# Altium PCB ver060.PcbDoc (part 2 of 2)
Units mm, origin at the board's own origin, x right, y up, seen from the top; angles counter-clockwise.
Board outline 100 x 49.5 mm, 4 copper layers (ASIG, GND1, GND2, PWR/DSIG), stack 1.569 mm thick; 117 components, 72 nets, 379 pads, 822 vias.
Unrouted connection lines stored in the file: 69.
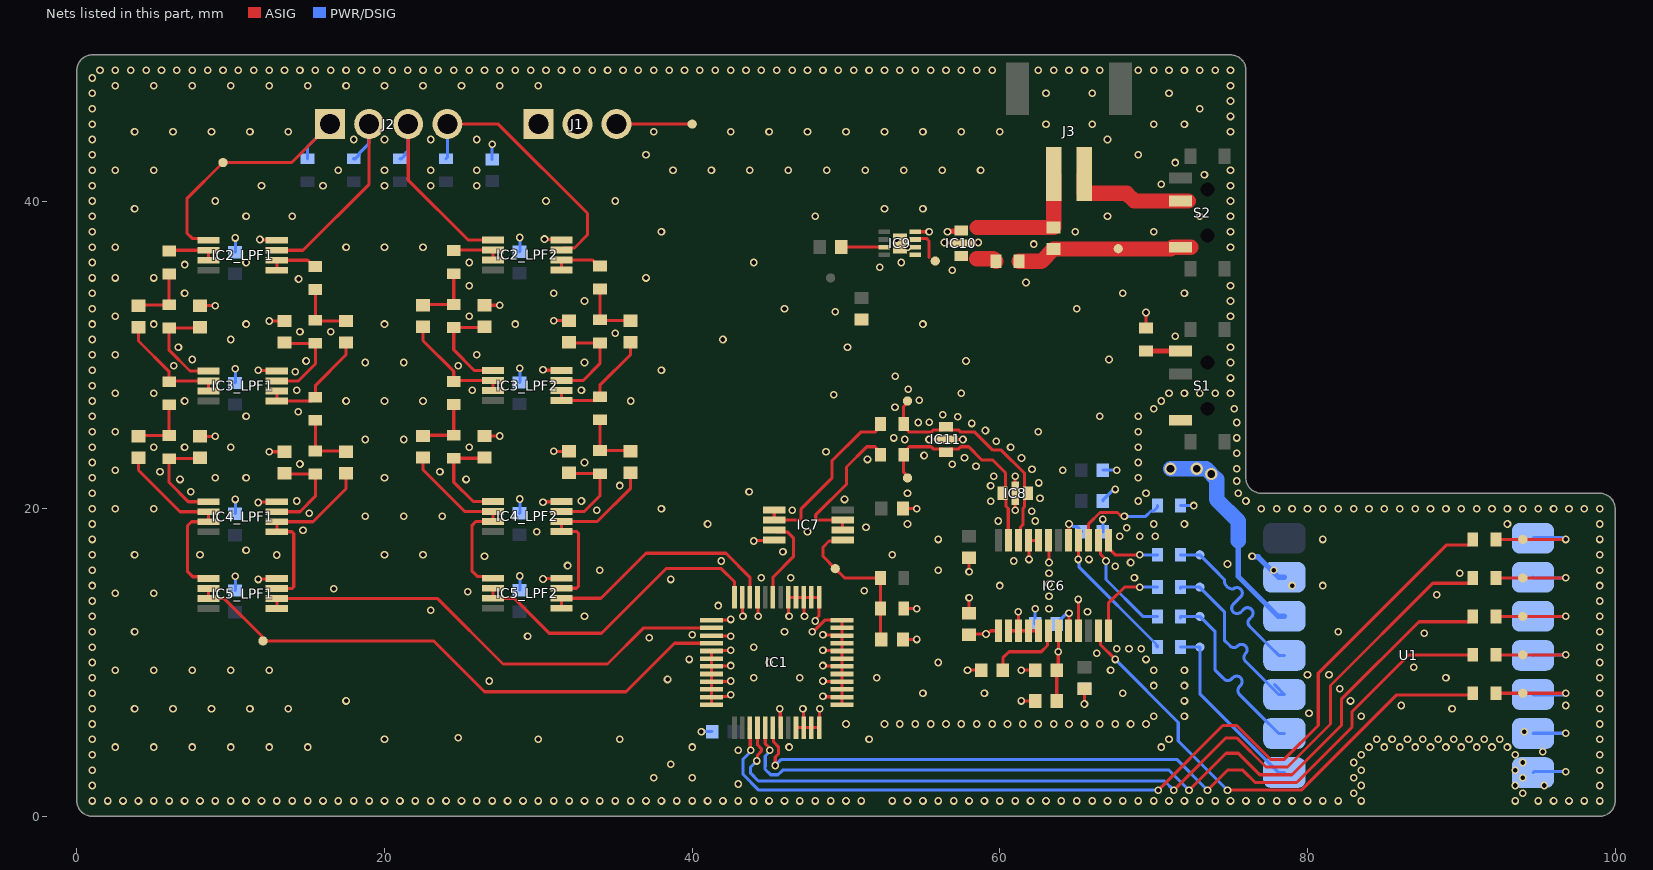
[diagram p4: the nets of this part, all layers, seen from the top]

## Via types
v1: diameter 0.5, hole 0.3, ASIG to PWR/DSIG, tented both sides, 784 vias
v2: diameter 0.8, hole 0.5, ASIG to PWR/DSIG, tented both sides, 30 vias
v3: diameter 0.8, hole 0.5, ASIG to PWR/DSIG, 8 vias

## Nets (pads, with @x,y where several pads share a name; then routed paths per layer and width w, separated by ;. In a path a pad name is that pad's centre, name@x,y a point inside that pad or via, vN(x,y) a via of type N, cw(c..) or ccw(c..) an arc to the next point about the centre after c; other vN are vias at no path point) (continued)
GND: C1.1 C4_LPF1.1 C4_LPF2.1 C5_LPF1.1 C5_LPF2.1 C6_LPF1.1 C6_LPF2.1 C7_LPF1.1 C7_LPF2.1 C8_LPF1.1 C8_LPF2.1 C9_LPF1.1 C9_LPF2.1 C10_LPF1.1 C10_LPF2.1 C11_LPF1.1 C11_LPF2.1 C14.2 C15.2 C16.2 C17.2 C18.2 C19.2 C20.1 C20.2 C21.1 C21.2 C22.2 C23.1 C24.1 C24.2 C25.2 C26.2 C28.2 C29.2 C30.1 IC1.1 IC1.3 IC1.5 IC1.6 IC1.7 IC1.8 IC1.9 IC1.10 IC1.11 IC1.12 IC1.19 IC1.21 IC1.22 IC1.23 IC1.24 IC1.25 IC1.26 IC1.27 IC1.28 IC1.29 IC1.30 IC1.31 IC1.32 IC1.33 IC1.34 IC1.35 IC1.36 IC1.37 IC1.38 IC1.39 IC1.40 IC1.41 IC1.45 IC1.47 IC2_LPF1.4 IC2_LPF2.4 IC3_LPF1.4 IC3_LPF2.4 IC4_LPF1.4 IC4_LPF2.4 IC5_LPF1.4 IC5_LPF2.4 IC6.7 IC6.8 IC6.9 IC6.13 IC6.14 IC6.15 IC6.16 IC6.17 IC6.19 IC6.21 IC7.4 IC8.G1 IC9.2 IC9.4 IC9.9 IC10.B1 IC10.G1 IC11.G1 J1.1 J1.2 J1.3 J3.2 R6.1 R15.2 R18.2 T1.1 U1.6 U1.7 U1.13 | length 126.7
  ASIG w0.2: C11_LPF1.1@8,24.7 v1(9,24.7) ; C10_LPF1.1@8,33.2 v1(9,33.2) ; v1(11.8,15.4) 11.825,15.425 12.975,15.425 IC5_LPF1.4@13,15.45 ; v1(11.8,20.4) 11.825,20.425 12.975,20.425 IC4_LPF1.4@13,20.45 ; v1(11.8,29) 11.825,28.975 12.975,28.975 IC3_LPF1.4@13,28.95 ; v1(11.9,37.5) 11.925,37.475 12.975,37.475 IC2_LPF1.4@13,37.45 ; v1(12.5,23.7) C5_LPF1.1@13.5,23.7 ; v1(12.5,32.2) C4_LPF1.1@13.5,32.2 ; C11_LPF2.1@26.5,24.725 v1(27.5,24.725) ; C10_LPF2.1@26.5,33.225 v1(27.5,33.225) ; v1(30.3,15.425) 30.325,15.45 31.475,15.45 IC5_LPF2.4@31.5,15.475 ; v1(30.3,20.425) 30.325,20.45 31.475,20.45 IC4_LPF2.4@31.5,20.475 ; v1(30.3,29.025) 30.325,29 31.475,29 IC3_LPF2.4@31.5,28.975 ; v1(30.4,37.525) 30.425,37.5 31.475,37.5 IC2_LPF2.4@31.5,37.475 ; v1(31,23.725) C5_LPF2.1@32,23.725 ; v1(31,32.225) C4_LPF2.1@32,32.225 ; J1.3@35.08,45 T1.1@40,45 ; IC1.12@41.262,7.25 IC1.11@41.262,7.75 ; IC1.3@41.262,11.75 41.287,11.725 42.475,11.725 v1(42.5,11.7) ; IC1.1@41.262,12.75 41.287,12.775 42.475,12.775 v1(42.5,12.8) ; v1(42.5,7.9) 42.419,7.9 42.299,7.781 41.293,7.781 IC1.11@41.262,7.75 ; v1(42.5,8.8) 42.475,8.775 41.287,8.775 IC1.9@41.262,8.75 ; v1(42.5,9.8) 42.475,9.775 41.287,9.775 IC1.7@41.262,9.75 ; v1(42.5,10.8) 42.475,10.775 41.287,10.775 IC1.5@41.262,10.75 IC1.6@41.262,10.25 IC1.7@41.262,9.75 ; IC1.47@43.25,14.238 43.275,14.213 43.275,13.025 v1(43.3,13) ; v1(44,17.9) 44.032,17.932 45.303,17.932 IC7.4@45.336,17.964 ; IC1.45@44.25,14.238 44.275,14.213 44.275,13.025 v1(44.3,13) ; v1(45.7,7) 45.725,6.975 45.725,5.787 IC1.19@45.75,5.762 ; v1(46.3,13) 46.275,13.025 46.275,14.213 IC1.41@46.25,14.238 IC1.40@46.75,14.238 IC1.39@47.25,14.238 ; IC1.21@46.75,5.762 IC1.22@47.25,5.762 ; v1(47.2,7) 47.225,6.975 47.225,5.787 IC1.22@47.25,5.762 ; v1(47.3,13) 47.275,13.025 47.275,14.213 IC1.39@47.25,14.238 ; v1(47.8,12) 47.866,12 48.616,12.75 IC1.36@49.738,12.75 IC1.35@49.738,12.25 IC1.34@49.738,11.75 ; v1(48,12.7) 48,12.781 48.25,13.031 IC1.37@48.25,14.238 IC1.38@47.75,14.238 IC1.39@47.25,14.238 ; v1(48.3,7) 48.275,6.975 48.275,5.787 IC1.24@48.25,5.762 IC1.23@47.75,5.762 IC1.22@47.25,5.762 ; v1(48.5,7.8) 48.525,7.775 49.713,7.775 IC1.26@49.738,7.75 ; v1(48.5,8.8) 48.525,8.775 49.713,8.775 IC1.28@49.738,8.75 ; v1(48.5,9.8) 48.525,9.775 49.713,9.775 IC1.30@49.738,9.75 ; v1(48.5,10.8) 48.525,10.775 49.713,10.775 IC1.32@49.738,10.75 ; v1(48.5,11.8) 48.525,11.775 49.713,11.775 IC1.34@49.738,11.75 ; IC1.25@49.738,7.25 IC1.26@49.738,7.75 ; C23.1@53.7,11.5 v1(54.6,11.5) ; C26.2@53.7,20 v1(54.6,20) ; R6.1@53.75,13.5 v1(54.6,13.5) ; v1(54,37) IC9.2@54.5,37 ; IC9.4@54.5,38 v1(55.4,38) ; v1(55.4,24.5) v1(57.6,24.5) ; v1(56.4,37.3) 56.425,37.275 58.575,37.275 v1(58.6,37.3) ; v1(57.9,9.5) C22.2@58.8,9.5 ; C24.1@58,11.8 58.05,11.85 v1(59.1,11.85) ; C24.2@58,13.2 v1(58,14.2) ; v1(58,15.9) C25.2@58,16.8 ; v1@59.1,11.8 59.138,11.8 59.4,12.062 IC6.13@59.925,12.062 ; IC6.14@60.575,12.062 IC6.15@61.225,12.062 ; v1(61,19.9) IC8.G1@61,21 v1(61,22.1) ; v1(61.2,13.3) 61.212,13.287 61.212,12.074 IC6.15@61.225,12.062 ; v1(61.4,7.5) C21.1@62.3,7.5 ; v1(61.4,9.5) C20.1@62.3,9.5 ; v1(61.9,16.7) 61.887,16.713 61.887,17.925 IC6.9@61.875,17.938 IC6.8@62.525,17.938 IC6.8@62.512,17.925 ; IC6.17@62.525,12.062 IC6.16@61.875,12.062 IC6.15@61.225,12.062 ; IC6.7@63.175,17.938 63.187,17.925 63.187,16.513 v1(63.2,16.5) ; C21.2@63.7,7.5 C20.2@63.7,9.5 63.8,9.6 v1(63.8,10.7) 63.812,10.712 63.812,12.049 IC6.19@63.825,12.062 ; v1(65.1,14.1) 65.112,14.088 65.112,12.074 IC6.21@65.125,12.062 ; v1(65.5,7.3) C14.2@65.5,8.3 ; R18.2@69.5,31.75 v1(69.5,32.75) ; IC1.11@41.262,7.75 IC1.10@41.262,8.25 IC1.9@41.262,8.75 ; IC1.9@41.262,8.75 IC1.8@41.262,9.25 IC1.7@41.262,9.75 ; IC1.26@49.738,7.75 IC1.27@49.738,8.25 IC1.28@49.738,8.75 ; IC1.28@49.738,8.75 IC1.29@49.738,9.25 IC1.30@49.738,9.75 ; IC1.30@49.738,9.75 IC1.31@49.738,10.25 IC1.32@49.738,10.75 ; IC1.32@49.738,10.75 IC1.33@49.738,11.25 IC1.34@49.738,11.75
  ASIG w0.35: v1(56.6,38) 56.641,38 56.671,38.03 57.45,38.03 IC10.B1@57.5,38.08
  ASIG w1: 58.517,38.28 C29.2@63.5,38.28 J3.2@63.5,41.75
  PWR/DSIG w0.2: C9_LPF1.1@10.275,14.675 10.3,14.7 v1(10.3,15.6) ; C8_LPF1.1@10.275,19.675 10.3,19.7 v1(10.3,20.6) ; C7_LPF1.1@10.275,28.175 10.3,28.2 v1(10.3,29.1) ; C6_LPF1.1@10.275,36.675 10.3,36.7 v1(10.3,37.6) ; C30.1@27,42.7 v1(27,43.7) ; C9_LPF2.1@28.775,14.7 28.8,14.725 v1(28.8,15.625) ; C8_LPF2.1@28.775,19.7 28.8,19.725 v1(28.8,20.625) ; C7_LPF2.1@28.775,28.2 28.8,28.225 v1(28.8,29.125) ; C6_LPF2.1@28.775,36.7 28.8,36.725 v1(28.8,37.625) ; v1(40.6,5.5) C1.1@41.3,5.5 ; C19.2@62.3,12.5 v1(62.3,13.5) ; v1(65.5,7.3) C15.2@65.5,8.3 ; C18.2@66.7,18.5 v1(66.7,19.3) ; C17.2@66.7,20.5 66.7,20.55 67.343,21.193 67.443,21.193 v1(67.5,21.25) ; C16.2@66.7,22.5 v1(67.6,22.5) ; R15.2@71.75,20.2 v1(72.6,20.2) ; U1.7@94.665,2.84 94.725,2.9 v1(96.8,2.9) ; U1.6@94.665,5.38 94.685,5.4 v1(96.8,5.4)
  PWR/DSIG w0.35: v1(76.4,16.9) 76.429,16.871 76.794,16.871 78.125,15.54 U1.13@78.5,15.54
  other v1: 1,1 2,1 3,1 4,1 5,1 6,1 7,1 8,1 9,1 10,1 11,1 12,1 13,1 14,1 15,1 16,1 17,1 18,1 19,1 20,1 21,1 22,1 23,1 24,1 25,1 26,1 27,1 28,1 29,1 30,1 31,1 32,1 33,1 34,1 35,1 36,1 37,1 38,1 39,1 40,1 41,1 42,1 43,1 44,1 45,1 46,1 47,1 48,1 49,1 50,1 51,1 53,1 54,1 55,1 56,1 57,1 58,1 59,1 60,1 61,1 62,1 63,1 64,1 65,1 66,1 67,1 68,1 69,1 70,1 71,1 72,1 73,1 74,1 75,1 76,1 77,1 78,1 79,1 80,1 81,1 82,1 83.5,1 93.5,1 95,1 96,1 97,1 98,1 99,1 83,1.5 94,1.5 1,2 83.5,2 93.5,2 95.4,2 99,2 43,2.1 37.5,2.5 40,2.5 83,2.5 94,2.5 1,3 83.5,3 93.5,3 99,3 38.606,3.387 83,3.5 94,3.5 1,4 83.5,4 93.5,4 99,4 95.3,4.2 43,4.3 2.5,4.5 5,4.5 7.5,4.5 10,4.5 12.5,4.5 15,4.5 40,4.5 46.3,4.5 70.5,4.5 84,4.5 85,4.5 86,4.5 87,4.5 88,4.5 89,4.5 90,4.5 91,4.5 92,4.5 93,4.5 1,5 20,5 30,5 35.3,5 51.5,5 71,5 84.5,5 85.5,5 86.5,5 87.5,5 88.5,5 89.5,5 90.5,5 91.5,5 92.5,5 99,5 24.8,5.1 94.1,5.5 1,6 50,6 52.5,6 53.5,6 54.5,6 55.5,6 56.5,6 57.5,6 58.5,6 59.5,6 60.5,6 61.5,6 62.5,6 63.5,6 64.5,6 65.5,6 66.5,6 67.5,6 68.5,6 69.5,6 99,6 70,6.5 72,6.5 83.5,6.5 80.1,6.7 1,7 3.75,7 6.25,7 8.75,7 11.25,7 13.75,7 89.4,7 99,7 86.1,7.2 96.8,7.2 17.5,7.5 72,7.5 82.8,7.5 1,8 55,8 59,8 68,8 99,8 82.1,8.3 70,8.5 72,8.5 26.8,8.8 38.4,8.9 1,9 44,9 47,9 52,9 89,9 99,9 80,9.2 81.4,9.2 2.5,9.5 5,9.5 7.5,9.5 10,9.5 12.5,9.5 67.2,9.5 70,9.5 72,9.5 86.9,9.7 1,10 45,10 56,10 99,10 39.8,10.2 69.5,10.2 66.3,10.6 67.6,10.9 68.4,10.9 69.2,10.9 1,11 44,11 99,11 37.2,11.6 29.3,11.7 40,11.8 87.6,11.9 1,12 3.75,12 46,12 82,12 99,12 1,13 33,13 99,13 65.7,13.3 23,13.4 63.2,13.5 41.7,13.7 1,14 99,14 63.2,14.3 88.4,14.4 2.5,14.5 5,14.5 25.4,14.6 51.195,14.657 16.7,14.8 1,15 60,15 79,15 81,15 99,15 63.2,15.1 38.6,15.4 44.5,15.5 46.4,15.5 68.75,15.5 63.2,15.8 89.9,15.8 1,16 34,16 56,16 77.8,16 99,16 67.5,16.25 31.9,16.3 74.8,16.4 68.5,16.5 41.9,16.6 60.9,16.6 65.8,16.7 26.5,16.9 1,17 3.75,17 8,17 12.988,16.988 20,17 22.5,17 53,17 99,17 45.9,17.2 11,17.3 1,18 56,18 81,18 99,18 67.8,18.2 69.1,18.2 70.1,18.2 29.9,18.5 47.5,18.5 14.7,18.6 68.25,18.75 51.3,18.8 1,19 41,19 54,19 70,19 72,19 93,19 99,19 59.9,19.2 62.3,19.2 18.75,19.5 21.25,19.5 23.75,19.5 15.1,19.7 62.081,19.825 33.8,19.9 46.5,19.9 1,20 2.5,20 5,20 38,20 77,20 78,20 79,20 80,20 81,20 82,20 83,20 84,20 85,20 86,20 87,20 88,20 89,20 90,20 91,20 92,20 93,20 94,20 95,20 96,20 97,20 98,20 99,20 59.406,20.482 14.3,20.5 32.8,20.5 69,20.5 76,20.5 49.9,20.6 62.609,20.675 1,21 54,21 69.5,21 75.5,21 7.4,21.1 43.7,21.1 59.399,21.482 35.3,21.5 62.539,21.672 75.4,21.8 6.7,21.9 25.3,21.9 1,22 9,22 11,22 20,22 69,22 59.6,22.1 5.4,22.4 23.6,22.4 2.5,22.5 64.1,22.5 62.091,22.566 75.4,22.6 58.454,22.754 56.917,22.891 14.5,22.9 1,23 33,23 69,23 51.4,23.2 57.7,23.3 61.407,23.295 55.075,23.458 75.4,23.6 48.7,23.7 1,24 5,24 7,24 10,24 25.5,24 60.699,24.003 69,24 59.771,24.374 53.819,24.494 18.75,24.5 21.25,24.5 53.1,24.6 75.4,24.6 1,25 2.5,25 62.5,25 69,25 59.064,25.081 58.176,25.542 54.7,25.6 55.416,25.609 75.4,25.6 57.273,25.97 1,26 11,26 66.5,26 69,26 56.282,26.109 14.4,26.3 70,26.5 75.25,26.5 53.183,26.589 1,27 7,27 17.5,27 20,27 22.5,27 36,27 70.5,27 54.756,27.053 49.2,27.4 2.5,27.5 5,27.5 57.5,27.5 71,27.5 72,27.5 73,27.5 74,27.5 75,27.5 14.3,27.7 25.7,27.7 32.8,27.7 54.044,27.756 1,28 75,28.5 53.2,28.6 14.2,28.9 1,29 38,29 6.3,29.3 24.8,29.3 18.75,29.5 21.25,29.5 33,29.5 75,29.5 14.9,29.6 57.8,29.6 7.5,29.7 67.1,29.7 1,30 2.5,30 26,30 6.6,30.5 50.1,30.5 75,30.5 1,31 10,31 42,31 71.4,31.2 35,31.4 14.5,31.5 16.5,31.5 1,32 5,32 11,32 20,32 28.5,32 55,32 2.5,32.5 25.5,32.5 75,32.5 49.3,32.8 1,33 46,33 65,33 33,33.5 75,33.5 1,34 7,34 31,34 68,34 72,34 25.5,34.5 75,34.5 61.7,34.7 14.412,34.93 1,35 2.5,35 5,35 37,35 56.9,35.5 52.2,35.7 7.022,35.868 1,36 11,36 25.5,36 44,36 53.6,36 1,37 2.5,37 17.5,37 20,37 22.5,37 75,37 62.2,37.2 53.3,37.5 1,38 38,38 64.9,38 70,38 75,38 1,39 11,39 14,39 48,39 67,39 73,39 75,39 3.75,39.5 52.5,39.5 55,39.5 1,40 9,40 30.5,40 35,40 75,40 1,41 12,41 16,41 20,41 23,41 26,41 75,41 70.5,41.1 73.3,41.7 1,42 2.5,42 5,42 17,42 20,42 23,42 26,42 38.75,42 41.25,42 43.75,42 46.25,42 48.75,42 51.25,42 53.75,42 56.25,42 58.75,42 75,42 71.4,42.5 1,43 37,43 69,43 1,44 18,44 20,44 23,44 26,44 67,44 3.75,44.5 6.25,44.5 8.75,44.5 11.25,44.5 13.75,44.5 37.5,44.5 42.5,44.5 45,44.5 47.5,44.5 50,44.5 52.5,44.5 55,44.5 57.5,44.5 60,44.5 75,44.5 1,45 63,45 66,45 70,45 72,45 75,45.5 1,46 73,46 75,46.5 1,47 63,47 66,47 71,47 2.5,47.5 5,47.5 7.5,47.5 10,47.5 12.5,47.5 15,47.5 17.5,47.5 20,47.5 22.5,47.5 25,47.5 27.5,47.5 30,47.5 75,47.5 1,48 1.5,48.5 2.5,48.5 3.5,48.5 4.5,48.5 5.5,48.5 6.5,48.5 7.5,48.5 8.5,48.5 9.5,48.5 10.5,48.5 11.5,48.5 12.5,48.5 13.5,48.5 14.5,48.5 15.5,48.5 16.5,48.5 17.5,48.5 18.5,48.5 19.5,48.5 20.5,48.5 21.5,48.5 22.5,48.5 23.5,48.5 24.5,48.5 25.5,48.5 26.5,48.5 27.5,48.5 28.5,48.5 29.5,48.5 30.5,48.5 31.5,48.5 32.5,48.5 33.5,48.5 34.5,48.5 35.5,48.5 36.5,48.5 37.5,48.5 38.5,48.5 39.5,48.5 40.5,48.5 41.5,48.5 42.5,48.5 43.5,48.5 44.5,48.5 45.5,48.5 46.5,48.5 47.5,48.5 48.5,48.5 49.5,48.5 50.5,48.5 51.5,48.5 52.5,48.5 53.5,48.5 54.5,48.5 55.5,48.5 56.5,48.5 57.5,48.5 58.5,48.5 59.5,48.5 62.5,48.5 63.5,48.5 64.5,48.5 65.5,48.5 66.5,48.5 69,48.5 70,48.5 71,48.5 72,48.5 73,48.5 74,48.5 75,48.5
lpf_in_p11: IC2_LPF1.5 J2.1 R1.2 T2.1 | length 18
  ASIG w0.2: IC2_LPF1.5@8.55,37.45 8.425,37.575 7.5,37.575 7.15,37.925 7.15,40.15 T2.1@9.5,42.5 13.96,42.5 J2.1@16.46,45
  PWR/DSIG w0.2: R1.2@15,42.75 15,43.54 J2.1@16.46,45
lpf_in_p12: IC2_LPF2.5 J2.3 R3.2 | length 13.5
  ASIG w0.2: J2.3@21.54,45 21.54,41.36 25.425,37.475 IC2_LPF2.5@27.05,37.475 IC2_LPF2.5@26.925,37.6
  PWR/DSIG w0.2: R3.2@21,42.75 21.1,42.75 21.35,43 21.35,43.1 21.54,43.29 J2.3@21.54,45
lpf_in_p21: IC2_LPF1.3 J2.2 R2.2 | length 14.4
  ASIG w0.2: IC2_LPF1.3@13.025,36.775 IC2_LPF1.3@13,36.8 14.7,36.8 19,41.1 J2.2@19,45
  PWR/DSIG w0.2: R2.2@18,42.75 18.1,42.75 18.35,43 18.35,43.1 18.975,43.725 18.975,44.975 J2.2@19,45
lpf_in_p22: IC2_LPF2.3 J2.4 R4.2 | length 17.3
  ASIG w0.2: J2.4@24.08,45 27.4,45 33.2,39.2 33.2,37.801 32.349,36.95 31.625,36.95 IC2_LPF2.3@31.5,36.825 IC2_LPF2.3@31.525,36.8
  PWR/DSIG w0.2: R4.2@24,42.75 24.08,42.83 J2.4@24.08,45
NetC2_LPF1_1: C2_LPF1.1 R7_LPF1.1 R8_LPF1.2 | length 4
  ASIG w0.2: R7_LPF1.1@15.5,34.25 R8_LPF1.2@15.5,32.25 15.55,32.2 C2_LPF1.1@17.5,32.2
NetC2_LPF1_2: C2_LPF1.2 IC3_LPF1.1 IC3_LPF1.2 R9_LPF1.2 | length 7.6
  ASIG w0.2: IC3_LPF1.2@13,27.65 IC3_LPF1.1@13,27 14.387,27 15.25,27 R9_LPF1.2@15.5,27.25 15.5,28 17.5,30 C2_LPF1.2@17.5,30.8
NetC2_LPF2_1: C2_LPF2.1 R7_LPF2.1 R8_LPF2.2 | length 4
  ASIG w0.2: R7_LPF2.1@34,34.275 R8_LPF2.2@34,32.275 34.05,32.225 C2_LPF2.1@36,32.225
NetC2_LPF2_2: C2_LPF2.2 IC3_LPF2.1 IC3_LPF2.2 R9_LPF2.2 | length 7.6
  ASIG w0.2: IC3_LPF2.2@31.5,27.675 IC3_LPF2.1@31.5,27.025 32.887,27.025 33.75,27.025 R9_LPF2.2@34,27.275 34,28.025 36,30.025 C2_LPF2.2@36,30.825
NetC3_LPF1_1: C3_LPF1.1 R9_LPF1.1 R10_LPF1.2 | length 4
  ASIG w0.2: R9_LPF1.1@15.5,25.75 R10_LPF1.2@15.5,23.75 17.45,23.75 C3_LPF1.1@17.5,23.7
NetC3_LPF1_2: C3_LPF1.2 IC4_LPF1.1 IC4_LPF1.2 IC5_LPF1.3 | length 12.8
  ASIG w0.2: IC5_LPF1.3@13,14.8 13.975,14.8 14.1,14.925 14.1,18.375 13.975,18.5 IC4_LPF1.1@13,18.5 IC4_LPF1.2@13,19.15 15.35,19.15 17.5,21.3 C3_LPF1.2@17.5,22.3
NetC3_LPF2_1: C3_LPF2.1 R9_LPF2.1 R10_LPF2.2 | length 4
  ASIG w0.2: R9_LPF2.1@34,25.775 R10_LPF2.2@34,23.775 35.95,23.775 C3_LPF2.1@36,23.725
NetC3_LPF2_2: C3_LPF2.2 IC4_LPF2.1 IC4_LPF2.2 IC5_LPF2.3 | length 12.8
  ASIG w0.2: IC5_LPF2.3@31.5,14.825 32.475,14.825 32.6,14.95 32.6,18.4 32.475,18.525 IC4_LPF2.1@31.5,18.525 IC4_LPF2.2@31.5,19.175 33.85,19.175 36,21.325 C3_LPF2.2@36,22.325
NetC4_LPF1_2: C4_LPF1.2 IC3_LPF1.3 R8_LPF1.1 | length 6.3
  ASIG w0.2: IC3_LPF1.3@13,28.3 14.4,28.3 15.5,29.4 R8_LPF1.1@15.5,30.75 13.55,30.75 C4_LPF1.2@13.5,30.8
NetC4_LPF2_2: C4_LPF2.2 IC3_LPF2.3 R8_LPF2.1 | length 6.3
  ASIG w0.2: IC3_LPF2.3@31.5,28.325 32.9,28.325 34,29.425 R8_LPF2.1@34,30.775 32.05,30.775 C4_LPF2.2@32,30.825
NetC5_LPF1_2: C5_LPF1.2 IC4_LPF1.3 R10_LPF1.1 | length 6.4
  ASIG w0.2: IC4_LPF1.3@13.008,19.808 IC4_LPF1.3@13,19.8 14.5,19.8 15.5,20.8 R10_LPF1.1@15.5,22.25 13.55,22.25 C5_LPF1.2@13.5,22.3
NetC5_LPF2_2: C5_LPF2.2 IC4_LPF2.3 R10_LPF2.1 | length 6.4
  ASIG w0.2: IC4_LPF2.3@31.508,19.833 IC4_LPF2.3@31.5,19.825 33,19.825 34,20.825 R10_LPF2.1@34,22.275 32.05,22.275 C5_LPF2.2@32,22.325
NetC10_LPF1_2: C10_LPF1.2 IC3_LPF1.5 R12_LPF1.1 | length 6.6
  ASIG w0.2: C10_LPF1.2@8,31.8 7.95,31.75 R12_LPF1.1@6,31.75 6,30.3 7.35,28.95 IC3_LPF1.5@8.55,28.95
NetC10_LPF2_2: C10_LPF2.2 IC3_LPF2.5 R12_LPF2.1 | length 6.6
  ASIG w0.2: C10_LPF2.2@26.5,31.825 26.45,31.775 R12_LPF2.1@24.5,31.775 24.5,30.325 25.85,28.975 IC3_LPF2.5@27.05,28.975
NetC11_LPF1_2: C11_LPF1.2 IC4_LPF1.5 R14_LPF1.1 | length 6.6
  ASIG w0.2: C11_LPF1.2@8,23.3 7.95,23.25 R14_LPF1.1@6,23.25 6,21.7 7.25,20.45 IC4_LPF1.5@8.55,20.45
NetC11_LPF2_2: C11_LPF2.2 IC4_LPF2.5 R14_LPF2.1 | length 6.6
  ASIG w0.2: C11_LPF2.2@26.5,23.325 26.45,23.275 R14_LPF2.1@24.5,23.275 24.5,21.725 25.75,20.475 IC4_LPF2.5@27.05,20.475
NetC12_LPF1_1: C12_LPF1.1 R11_LPF1.1 R12_LPF1.2 | length 4
  ASIG w0.2: C12_LPF1.1@4,33.2 4.05,33.25 R12_LPF1.2@6,33.25 R11_LPF1.1@6,35.25
NetC12_LPF1_2: C12_LPF1.2 IC3_LPF1.6 IC3_LPF1.7 R13_LPF1.2 | length 7.6
  ASIG w0.2: C12_LPF1.2@4,31.8 4,30.9 6,28.9 R13_LPF1.2@6,28.25 6.05,28.3 IC3_LPF1.6@8.55,28.3 IC3_LPF1.7@8.55,27.65
NetC12_LPF2_1: C12_LPF2.1 R11_LPF2.1 R12_LPF2.2 | length 4
  ASIG w0.2: C12_LPF2.1@22.5,33.225 22.55,33.275 R12_LPF2.2@24.5,33.275 R11_LPF2.1@24.5,35.275
NetC12_LPF2_2: C12_LPF2.2 IC3_LPF2.6 IC3_LPF2.7 R13_LPF2.2 | length 7.6
  ASIG w0.2: C12_LPF2.2@22.5,31.825 22.5,30.925 24.5,28.925 R13_LPF2.2@24.5,28.275 24.55,28.325 IC3_LPF2.6@27.05,28.325 IC3_LPF2.7@27.05,27.675
NetC13_LPF1_1: C13_LPF1.1 R13_LPF1.1 R14_LPF1.2 | length 4
  ASIG w0.2: C13_LPF1.1@4,24.7 4.05,24.75 R14_LPF1.2@6,24.75 R13_LPF1.1@6,26.75
NetC13_LPF1_2: C13_LPF1.2 IC4_LPF1.6 IC4_LPF1.7 IC5_LPF1.5 | length 13.1
  ASIG w0.2: C13_LPF1.2@4,23.3 4,22.5 6.7,19.8 IC4_LPF1.6@8.55,19.8 IC4_LPF1.7@8.55,19.15 7.45,19.15 7.2,18.9 7.2,15.9 7.525,15.575 8.425,15.575 IC5_LPF1.5@8.55,15.45
NetC13_LPF2_1: C13_LPF2.1 R13_LPF2.1 R14_LPF2.2 | length 4
  ASIG w0.2: C13_LPF2.1@22.5,24.725 22.55,24.775 R14_LPF2.2@24.5,24.775 R13_LPF2.1@24.5,26.775
NetC13_LPF2_2: C13_LPF2.2 IC4_LPF2.6 IC4_LPF2.7 IC5_LPF2.5 | length 13.1
  ASIG w0.2: C13_LPF2.2@22.5,23.325 22.5,22.525 25.2,19.825 IC4_LPF2.6@27.05,19.825 IC4_LPF2.7@27.05,19.175 25.95,19.175 25.7,18.925 25.7,15.925 26.025,15.6 26.925,15.6 IC5_LPF2.5@27.05,15.475
NetC18_1: C18.1 IC6.5 | length 2.1
  ASIG w0.2: IC6.5@64.475,17.938 64.487,17.95 64.487,18.987 v1(64.5,19)
  PWR/DSIG w0.2: v1(64.5,19) 64.581,19 64.731,18.85 65,18.85 65.3,18.55 C18.1@65.3,18.5
NetC19_1: C19.1 IC6.20 | length 2.3
  ASIG w0.2: IC6.20@64.475,12.062 64.487,12.074 64.487,13.187 v1(64.5,13.2)
  PWR/DSIG w0.2: C19.1@63.7,12.5 63.7,12.55 64.293,13.143 64.443,13.143 v1(64.5,13.2)
NetC22_1: C22.1 IC6.18 | length 5
  ASIG w0.2: C22.1@60.2,9.5 60.2,10.3 60.6,10.7 62.7,10.7 63.1,11.1 63.1,11.987 IC6.18@63.175,12.062
NetC27_2: C27.2 IC9.7 | length 2.8
  ASIG w0.2: C27.2@49.7,37 IC9.7@52.5,37
NetC29_1: C29.1 R28.2 S2.1 T16.1 | length 11.5
  ASIG w1: R28.2@61.25,36.08 62.7,36.08 C29.1@63.5,36.88 71.122,36.88 71.242,37 S2.1@71.75,37 S2.1@72.4,37
NetIC1_15: IC1.15 R19.2 | length 61.8
  ASIG w0.2: IC1.15@43.7,5.712 IC1.15@43.75,5.762 43.775,5.737 43.775,4.325 v1(43.8,4.3) ; v1(70.3,1.7) 74.5,5.9 75.4,5.9 77.6,3.7 78.5,3.7 80.7,5.9 80.7,9.3 89.05,17.65 90.5,17.65 90.75,17.9 R19.2@90.75,18
  PWR/DSIG w0.2: v1(43.8,4.3) 43.8,4.219 43.3,3.719 43.3,2.734 44.334,1.7 v1(70.3,1.7)
NetIC1_16: IC1.16 R20.2 | length 59.6
  ASIG w0.2: v1(44.2,3.6) 44.257,3.657 44.257,3.99 44.5,4.233 44.5,4.398 44.25,4.648 IC1.16@44.25,5.762 IC1.16@44.253,5.759 ; v1(71.3,1.7) 74.7,5.1 75.4,5.1 77.3,3.2 78.7,3.2 81.5,6 81.5,8.5 88.15,15.15 90.5,15.15 90.75,15.4 R20.2@90.75,15.5
  PWR/DSIG w0.2: v1(44.2,3.6) 43.8,3.2 43.8,2.8 44.3,2.3 70.7,2.3 v1(71.3,1.7)
NetIC1_17: IC1.17 R21.2 | length 56.7
  ASIG w0.2: IC1.17@44.75,5.762 44.75,4.724 44.993,4.482 44.993,4.357 v1(45.05,4.3) ; v1(72.3,1.7) 74.7,4.1 75.5,4.1 76.9,2.7 79,2.7 82.2,5.9 82.2,7.6 87.25,12.65 90.5,12.65 90.75,12.9 R21.2@90.75,13
  PWR/DSIG w0.2: v1(45.05,4.3) 45.05,4.219 44.75,3.919 44.75,3.25 44.733,3.233 44.733,3.067 45.1,2.7 45.578,2.7 45.878,3 71,3 v1(72.3,1.7)
NetIC1_18: IC1.18 R22.2 | length 53.9
  ASIG w0.2: IC1.18@45.25,5.762 45.3,5.712 45.3,4.828 45.6,4.528 45.6,4.054 45.4,3.855 v1(45.4,3.3) ; v1(73.5,1.7) 74.8,3 75.8,3 76.6,2.2 79.3,2.2 82.9,5.8 82.9,6.8 86.6,10.5 R22.2@90.75,10.5
  PWR/DSIG w0.2: v1(45.4,3.3) 45.8,3.7 71.5,3.7 v1(73.5,1.7)
NetIC2_LPF1_1: IC2_LPF1.1 IC2_LPF1.2 R7_LPF1.2 | length 3.3
  ASIG w0.2: IC2_LPF1.1@13,35.5 IC2_LPF1.2@13,36.15 15,36.15 15.4,35.75 R7_LPF1.2@15.5,35.75
NetIC2_LPF1_6: IC2_LPF1.6 IC2_LPF1.7 R11_LPF1.2 | length 3.2
  ASIG w0.2: R11_LPF1.2@6,36.75 6.05,36.8 IC2_LPF1.6@8.55,36.8 IC2_LPF1.7@8.55,36.15
NetIC2_LPF2_1: IC2_LPF2.1 IC2_LPF2.2 R7_LPF2.2 | length 3.3
  ASIG w0.2: IC2_LPF2.1@31.5,35.525 IC2_LPF2.2@31.5,36.175 33.5,36.175 33.9,35.775 R7_LPF2.2@34,35.775
NetIC2_LPF2_6: IC2_LPF2.6 IC2_LPF2.7 R11_LPF2.2 | length 3.2
  ASIG w0.2: R11_LPF2.2@24.5,36.775 24.55,36.825 IC2_LPF2.6@27.05,36.825 IC2_LPF2.7@27.05,36.175
NetIC6_1: IC6.1 R23.1 | length 3.9
  ASIG w0.2: IC6.1@67.075,17.938 67.075,17.425 67.5,17 v1(69.1,17)
  PWR/DSIG w0.2: v1(69.1,17) R23.1@70.25,17
NetIC6_2: IC6.2 R26.1 | length 7.1
  ASIG w0.2: IC6.2@66.425,17.938 66.55,17.813 66.55,17.028 66.9,16.678 v1(66.9,16.6)
  PWR/DSIG w0.2: v1(66.9,16.6) 66.9,15.4 69.3,13 R26.1@70.25,13
NetIC6_3: IC6.3 R15.1 | length 6.1
  ASIG w0.2: IC6.3@65.775,17.938 65.775,19.011 66.514,19.75 67.65,19.75 v1@67.9,19.5
  PWR/DSIG w0.2: v1(68.1,19.5) 69.479,19.5 69.829,19.85 70,19.85 70.25,20.1 R15.1@70.25,20.2
NetIC6_4: IC6.4 R27.1 | length 9.4
  ASIG w0.2: v1(65.1,16.7) 65.112,16.712 65.112,17.925 IC6.4@65.125,17.938 IC6.4@65.25,17.813
  PWR/DSIG w0.2: v1(65.1,16.7) 65.157,16.643 65.157,16.193 70.25,11.1 R27.1@70.25,11 R27.1@70.15,11.1
NetIC6_23: IC6.23 R24.2 | length 32.4
  ASIG w0.2: IC6.23@66.425,12.062 66.55,11.937 66.55,11.15 v1(67.5,10.2) ; v1(74.8,1.7) 79.6,1.7 85.8,7.9 90.65,7.9 R24.2@90.75,8
  PWR/DSIG w0.2: v1(67.5,10.2) 71.6,6.1 71.6,4.9 v1(74.8,1.7)
NetIC6_24: IC6.24 R25.1 | length 5.9
  ASIG w0.2: IC6.24@67.075,11.549 IC6.24@67.075,12.062 67.075,13.875 68.1,14.9 v1(69.1,14.9)
  PWR/DSIG w0.2: v1(69.1,14.9) R25.1@70.25,14.9
NetIC9_1: IC9.1 IC9.3 IC10.A1 R28.1 T17.1 | length 3.4
  ASIG w0.2: IC9.3@54.5,37.5 54.55,37.55 55.25,37.55 55.4,37.4 55.4,36.315
  ASIG w1: 58.5,36.25 59.58,36.25 R28.1@59.75,36.08
NetJ3_1: J3.1 S2.2 | length 8.2
  ASIG w1: J3.1@65.5,41.75 65.5,40.5 68.25,40.5 68.75,40 S2.2@71.75,40 S2.2@72.25,40
NetR18_1: R18.1 S1.3 | length 2.3
  ASIG w0.35: R18.1@69.5,30.25 S1.3@71.75,30.25
NetR19_1: R19.1 T7.1 U1.1 | length 6.8
  ASIG w0.2: R19.1@92.25,18 v1(96.8,18)
  PWR/DSIG w0.2: U1.1@94.665,18.08 94.713,18.128 96.59,18.128 96.719,18 v1(96.8,18)
NetR20_1: R20.1 T8.1 U1.2 | length 6.7
  ASIG w0.2: R20.1@92.25,15.5 T8.1@94,15.5 v1(96.8,15.5)
  PWR/DSIG w0.2: U1.2@94.665,15.54 94.705,15.5 v1(96.8,15.5)
NetR21_1: R21.1 T9.1 U1.3 | length 6.7
  ASIG w0.2: R21.1@92.25,13 T9.1@94,13 v1(96.8,13)
  PWR/DSIG w0.2: U1.3@94.665,13 v1(96.8,13)
NetR22_1: R22.1 T10.1 U1.4 | length 6.7
  ASIG w0.2: R22.1@92.25,10.5 T10.1@94,10.5 v1(96.8,10.5)
  PWR/DSIG w0.2: U1.4@94.665,10.46 94.705,10.5 v1(96.8,10.5)
NetR23_2: R23.2 T12.1 U1.11 | length 12.5
  PWR/DSIG w0.2: R23.2@71.75,17 T12.1@73,17 73.875,16.125 73.946,16.054 74.6,15.4 74.6,15.207 ccw(c75.182,15.37) 75.161,14.767 cw(c75.411,14.516) 75.662,14.767 cw(c75.411,14.516) 75.662,14.266 75.177,13.781 ccw(c75.427,13.531) 75.177,13.281 ccw(c75.427,13.531) 75.678,13.281 75.856,13.459 cw(c76.107,13.209) 76.357,13.459 cw(c76.107,13.209) 76.357,12.959 76.242,12.844 ccw(c76.492,12.593) 76.242,12.343 77.472,11.113 77.542,11.042 78.125,10.46 U1.11@78.5,10.46
NetR24_1: R24.1 T11.1 U1.5 | length 6.7
  ASIG w0.2: R24.1@92.25,8 v1(96.8,8)
  PWR/DSIG w0.2: U1.5@94.665,7.92 94.685,7.9 96.619,7.9 96.719,8 v1(96.8,8)
NetR25_2: R25.2 T13.1 U1.10 | length 12.5
  PWR/DSIG w0.2: R25.2@71.75,14.8 R25.2@71.75,14.9 T13.1@73,14.9 74.6,13.3 74.6,11.445 74.897,11.147 74.968,11.077 ccw(c75.219,11.327) 75.469,11.077 cw(c75.719,10.826) 75.969,11.077 cw(c75.719,10.826) 75.969,10.576 ccw(c76.22,10.326) 75.969,10.076 76.292,9.753 76.362,9.682 78.125,7.92 U1.10@78.5,7.92 U1.10@77.864,8.556
NetR26_2: R26.2 T14.1 U1.9 | length 12.5
  PWR/DSIG w0.2: R26.2@71.75,12.9 R26.2@71.75,13 T14.1@73,13 74,12 74,9.505 74.502,9.002 74.573,8.932 ccw(c74.824,9.182) 75.074,8.932 75.153,9.011 cw(c75.403,8.761) 75.654,9.011 cw(c75.403,8.761) 75.654,8.51 75.574,8.431 ccw(c75.825,8.181) 75.574,7.931 76.932,6.573 77.002,6.502 78.125,5.38 U1.9@78.5,5.38
NetR27_2: R27.2 T15.1 U1.8 | length 11.9
  PWR/DSIG w0.2: R27.2@71.75,11 T15.1@73,11 73,7.965 78.125,2.84 U1.8@78.5,2.84
NetS1_1: S1.1 U1.12 | length 14.2
  PWR/DSIG w0.35: 75.5,17.9 75.5,15.6 78.1,13 U1.12@78.5,13
  PWR/DSIG w1: v2(71.1,22.6) 73.4,22.6 74.1,21.9 74.1,20.6 75.5,19.2 75.5,17.9
  other v2: 73.75,22.25 72.8,22.6
out_11: IC1.4 IC5_LPF1.6 IC5_LPF1.7 T3.1 | length 37.3
  ASIG w0.2: IC5_LPF1.6@8.55,14.8 IC5_LPF1.7@8.55,14.15 9.59,14.15 12.023,11.716 12.023,11.477 T3.1@12.1,11.4 23.2,11.4 26.5,8.1 35.7,8.1 38.85,11.25 IC1.4@41.262,11.25
out_12: IC1.48 IC5_LPF2.6 IC5_LPF2.7 | length 20.4
  ASIG w0.2: IC5_LPF2.6@27.05,14.825 IC5_LPF2.7@27.05,14.175 28.425,14.175 30.7,11.9 34.1,11.9 38.3,16.1 41.9,16.1 42.75,15.25 IC1.48@42.75,14.238
out_21: IC1.2 IC5_LPF1.1 IC5_LPF1.2 | length 31.6
  ASIG w0.2: IC5_LPF1.1@13,13.5 IC5_LPF1.2@13,14.15 23.45,14.15 27.7,9.9 34.5,9.9 36.85,12.25 IC1.2@41.262,12.25
out_22: IC1.46 IC5_LPF2.1 IC5_LPF2.2 | length 16.1
  ASIG w0.2: IC5_LPF2.1@31.5,13.525 IC5_LPF2.2@31.5,14.175 34.075,14.175 37,17.1 42.2,17.1 43.75,15.55 IC1.46@43.75,14.238
Vbuff_1_N: IC6.11 IC8.B1 IC11.B1 R17.1 T6.1 | length 13.9
  ASIG w0.2: T6.1@54,22 54,22.108 53.75,22.358 R17.1@53.75,23.5 54,23.75 54,23.908 54.117,24.025 55.044,24.025 55.536,24.025 55.671,23.89 56.28,23.89 IC11.B1@56.5,23.67 56.72,23.89 57.329,23.89 57.464,24.025 57.975,24.025 58.8,23.2 58.824,23.176 59.524,23.176 60.372,22.328 60.372,21.202 IC8.B1@60.17,21 ; IC8.B1@60.39,20.78 60.39,20.171 60.55,20.011 60.55,17.963 IC6.11@60.575,17.938
Vbuff_1_P: IC6.10 IC8.A1 IC11.A1 R16.1 T5.1 | length 15.8
  ASIG w0.2: T5.1@54,27 54,26.892 53.75,26.642 R16.1@53.75,25.5 54,25.25 54,25.092 54.117,24.975 54.65,24.975 55.536,24.975 55.671,25.11 56.28,25.11 IC11.A1@56.5,25.33 56.72,25.11 57.329,25.11 57.464,24.975 58.369,24.975 59.544,23.8 60.1,23.8 61.6,22.3 61.6,21.355 61.83,21.125 IC8.A1@61.83,21 ; IC6.10@61.225,17.938 61.35,18.063 61.35,18.8 61.5,18.95 61.5,20.011 61.61,20.121 IC8.A1@61.61,21
Vbuff_N: IC7.6 IC7.7 R17.2 | length 9.7
  ASIG w0.2: IC7.6@49.786,18.614 IC7.7@49.786,19.264 48.153,19.264 48.036,19.381 48.036,19.596 50.029,21.589 50.029,22.704 51.35,24.025 51.883,24.025 52,23.908 52,23.75 R17.2@52.25,23.5
Vbuff_P: IC7.1 IC7.2 R16.2 | length 11.2
  ASIG w0.2: IC7.1@45.336,19.914 IC7.2@45.336,19.264 46.969,19.264 47.086,19.381 47.086,19.989 49.079,21.982 49.079,23.097 50.956,24.975 51.883,24.975 52,25.092 52,25.25 R16.2@52.25,25.5
Vin_N: C23.2 IC7.5 R5.1 R6.2 T4.1 | length 10.4
  ASIG w0.2: IC7.5@49.786,17.964 49.721,17.9 48.9,17.9 48.5,17.5 48.5,16.9 T4.1@49.3,16.1 49.9,15.5 R5.1@52.25,15.5 R6.2@52.25,13.5 52.25,11.55 C23.2@52.3,11.5
Vin_P: IC1.43 IC7.3 | length 5.9
  ASIG w0.2: IC1.43@45.25,14.238 45.25,15.55 46.6,16.9 46.6,18.074 46.185,18.489 45.461,18.489 IC7.3@45.336,18.614
pads on no net: IC1.42 IC1.44 IC9.5 J3.3 J3.4 S1.MH1 S1.MH2 S1.MP1 S1.MP2 S1.MP3 S1.MP4 S2.3 S2.MH1 S2.MH2 S2.MP1 S2.MP2 S2.MP3 S2.MP4 U1.14

## Polygon pours and split planes (outlines as drawn)
GND on ASIG "GND_L01_P025" (solid, remove dead copper, pour order 25): 70.5,26.3 71.2,27 76,27 76,49.5 75.926,49.574 0.074,49.574 0,49.5 0,0 51.5,0 51.5,4.5 52.5,5.5 69.5,5.5 70.5,6.5
GND on ASIG "GND_L01_P024" (solid, remove dead copper, pour order 24): 72.5,20.5 71.5,19.5 71.5,6 70,4.5 53,4.5 52.5,4 52.5,0 100,0 100,20.5
NetJ3_1 on ASIG "NETJ3_1_L01_P008" (solid, remove dead copper, pour order 8): 65,39.5 70.4,39.5 70.4,40.5 68.862,40.638 66.025,43.475 65.025,43.475
NetIC9_1 on ASIG "NETIC9_1_L01_P009" (solid, remove dead copper, pour order 9): 57,36.75 60.3,36.75 60.3,35.55 58.5,35.55 57.95,36.1 57,36.1
GND on ASIG "GND_L01_P010" (solid, remove dead copper, pour order 10): 57.05,37.75 64,37.75 64,43.5 62.818,43.5 57.95,38.4 57.05,38.4
NetC29_1 on ASIG "NETC29_1_L01_P011" (solid, remove dead copper, pour order 11): 68.65,35.575 70.55,35.575 71.475,36.5 71.475,37.5 70.65,37.5 70.6,37.45 63.2,37.45 62.325,36.575 60.75,36.575 60.75,35.575
NetIC9_1 on ASIG "NETIC9_1_L01_P012" (solid, remove dead copper, pour order 12): 54.975,36.75 54.875,36.65 54.116,36.65 54.116,35.05 55.55,35.05 56.6,36.1 57.95,36.1 57.95,36.75
3V3 on ASIG "3V3_L01_P014" (solid, remove dead copper, pour order 14): 52.875,36.35 52.825,36.3 51.9,36.3 51.45,35.85 51.45,33.3 49,33.3 47.6,31.9 47.6,22.9 46.9,22.2 39.4,22.2 39.4,40.5 49.6,40.5 51.025,39.075 51.25,38.7 52.058,37.65 52.875,37.65 52.875,37.35 51.75,37.35 50.725,37.875 48.8,38.2 48.8,36.5 49.2,36.1 50.1,36.1 51.45,36.65 52.875,36.65
3V3 on ASIG "3V3_L01_P015" (solid, remove dead copper, pour order 15): 72.5,28.4 70.9,28.4 69.6,27.1 61,27.1 60.75,27.35 58,30.1 54.6,30.1 52.1,32.6 52.1,32.65 51.45,33.3 50.5,33.3 50.5,34.1 51.45,34.112 61.788,34.112 66.8,29.1 72.5,29.1
NetS1_1 on ASIG "NETS1_1_L01_P016" (solid, remove dead copper, pour order 16): 75,21.5 75,26.1 69.8,26.1 69.8,21.5
GND on PWR/DSIG "GND_L04_P027" (solid, remove dead copper, pour order 27): 0,49.5 0.074,49.574 75.926,49.574 76,49.5 76,21 70.5,21 70.5,6.5 69.5,5.5 52.5,5.5 51.5,4.5 51.5,0 0,0
3V3 on PWR/DSIG "3V3_L04_P013" (solid, remove dead copper, pour order 13): 40.975,22.021 39.1,21.621 39.1,5.5 36.4,2.8 19.5,2.8 13.2,9.1 13.2,13 16.2,16 22.1,16 26.9,11.2 32.8,11.2 33.5,11.9 33.5,38.3 14.5,38.7 14.5,40.5 40.975,40.5 41.525,30.275 52.6,29.765 52.6,22.021
GND on PWR/DSIG "GND_L04_P026" (solid, remove dead copper, pour order 26): 72.5,20.5 71.5,19.5 71.5,6 70,4.5 53,4.5 52.5,4 52.5,0 100,0 100,20.5
GND on GND1 "GND_L02_P020" (solid, remove dead copper, pour order 20): 0,49.5 76,49.5 76,21 100,21 100,0 93,0 93,4 84,4 84,0 0,0
GND on GND2 "GND_L03_P023" (solid, remove dead copper, pour order 23): 0,49.5 76,49.5 76,21 100,21 100,0 93,0 93,4 84,4 84,0 0,0

## Keep-outs
Keep-Out Layer:
  lines w0.254: 0,1 ccw(c1,1) 1,0 ; 0,1 ccw(c1,1) 1,0 ; 0,1 0,48.5 ; 0,1 0,48.5 ; 0,48.5 cw(c1,48.5) 1,49.5 ; 0,48.5 cw(c1,48.5) 1,49.5 ; 1,0 99,0 ; 1,0 99,0 ; 1,49.5 75,49.5 ; 1,49.5 75,49.5 ; 75,49.5 cw(c75,48.5) 76,48.5 ; 75,49.5 cw(c75,48.5) 76,48.5 ; 76,22 ccw(c77,22) 77,21 ; 76,22 ccw(c77,22) 77,21 ; 76,22 76,48.5 ; 76,22 76,48.5 ; 77,21 99,21 ; 77,21 99,21 ; 99,0 ccw(c99,1) 100,1 ; 99,0 ccw(c99,1) 100,1 ; 99,21 cw(c99,20) 100,20 ; 99,21 cw(c99,20) 100,20 ; 100,1 100,20 ; 100,1 100,20

## Other copper
ASIG:
  pour cut-out: 67.5,11.2 70.5,11.2 70.5,17.9 69.6,17.9 67.5,17.9
  pour cut-out: 65.398,17 66,13 66.769,13 66.769,12.999 66.792,13.023 66.792,13.992 66.886,13.992 68.244,15.35 69.19,15.35 69.19,16.55 68.74,17
  pour cut-out: 24.716,29.141 25.384,29.141 25.562,28.963 25.562,28.714 25.473,28.625 24.8,28.625
  pour cut-out: 6.216,29.116 6.884,29.116 7.062,28.938 7.062,28.689 6.973,28.6 6.3,28.6
  pour cut-out: 81,9.183 81.284,8.716 81.284,6.253 81.132,6.101 81.062,6.101 81,6.163
  pour cut-out: 70.8,40.95 70.8,40.7 72.525,40.7 72.647,40.577 72.86,40.577 73,40.717 73,42.2 72.821,42.2 72.7,42.079 72.7,40.976 72.674,40.95
  pour cut-out: 64,43.5 64.5,43.5 64.5,37.6 64,37.5
  pour cut-out: 57.05,37.75 57,37.7 57,37.5 64,37.5 64.271,37.771
  pour cut-out: 62,43.5 57.1,38.6 56.855,38.6 56.855,38.122 57.557,38.122 62.934,43.5
  pour cut-out: 62.5,44 64.5,44 64.5,43.5 62,43.5
  pour cut-out: 84,0 84,4 93,4 93,0
PWR/DSIG:
  pour cut-out: 71.3,17 73,17 75.969,14.031 75.969,11.077 71.323,11.077 71.3,11.1
  pour cut-out: 64.5,17.9 70.9,17.9 70.9,11.2 69.4,11.2 64.5,16.1
  pour cut-out: 84,0 84,4 93,4 93,0

## Silkscreen, mask and mechanical layers (free items; w line width, h text height)
Top Overlay:
  lines w0.5: 60.7,30.45 60.7,32.35 ; 67.3,30.45 67.3,32.35
  text "OFF" at 68.904,41.608 h1
  text "+" at 68.9,40.1 h3 r180
  text "-" at 61.3,39.9 h3 r180
  text "ON" at 68.9,34.3 h1
  text "USB POWER" at 61.2,31.9 h1
  text "DVDD =>" at 56.4,31.15 h1
  text "Battery" at 61.2,30.1 h1
  text "WISP [Ver 0.60]" at 3.1,2.2 h1.5